# Altium PCB ChassisPowerDistribution_B_1.0_RW.PcbDoc
Units mil, origin at the board's own origin, x right, y up, seen from the top; angles counter-clockwise.
Board outline 3110 x 7580 mil, 2 copper layers (Top Layer, Bottom Layer); 87 components, 40 nets, 301 pads, 65 vias.
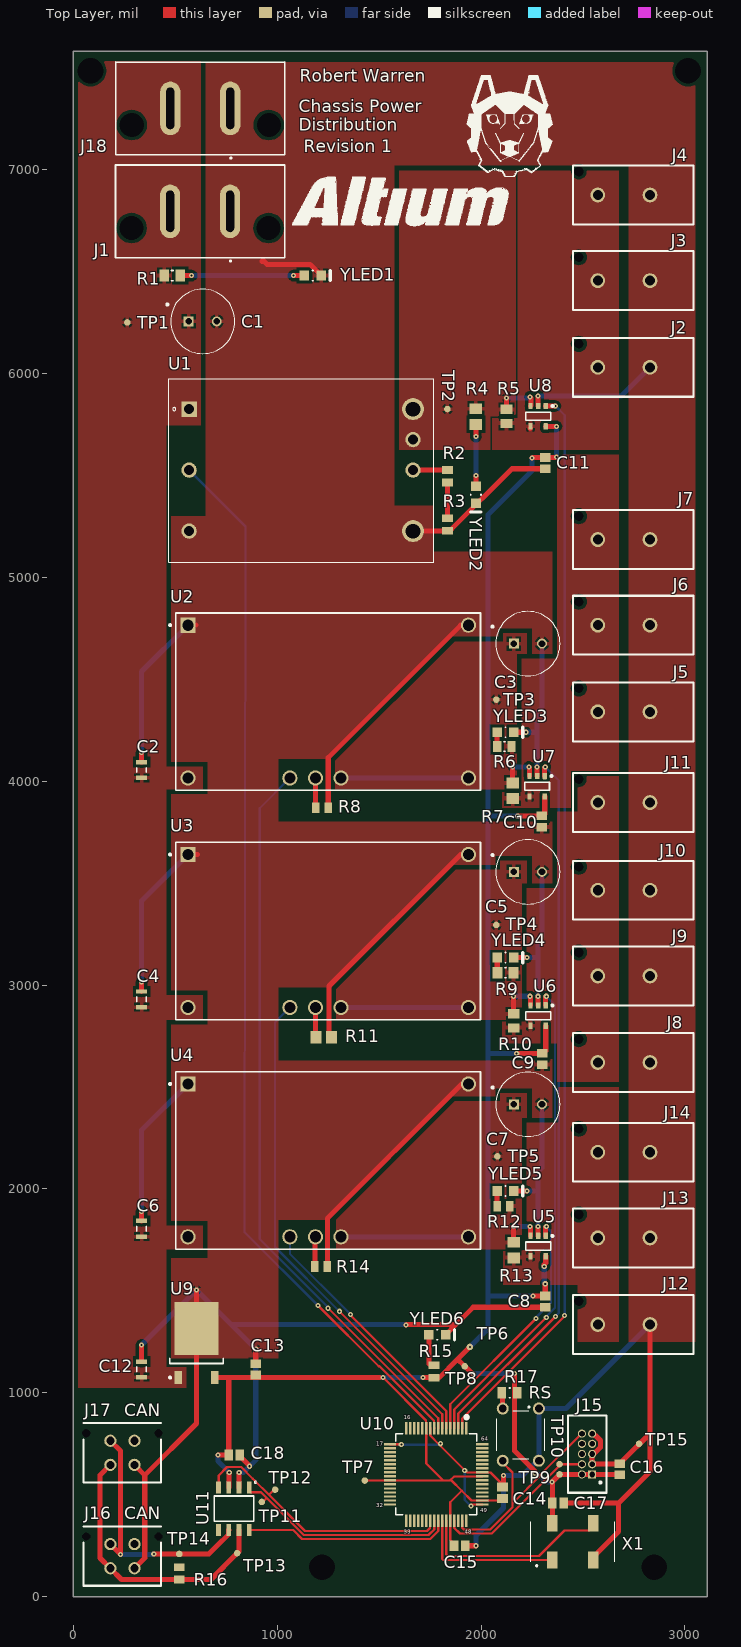
[diagram p0: Top Layer view]
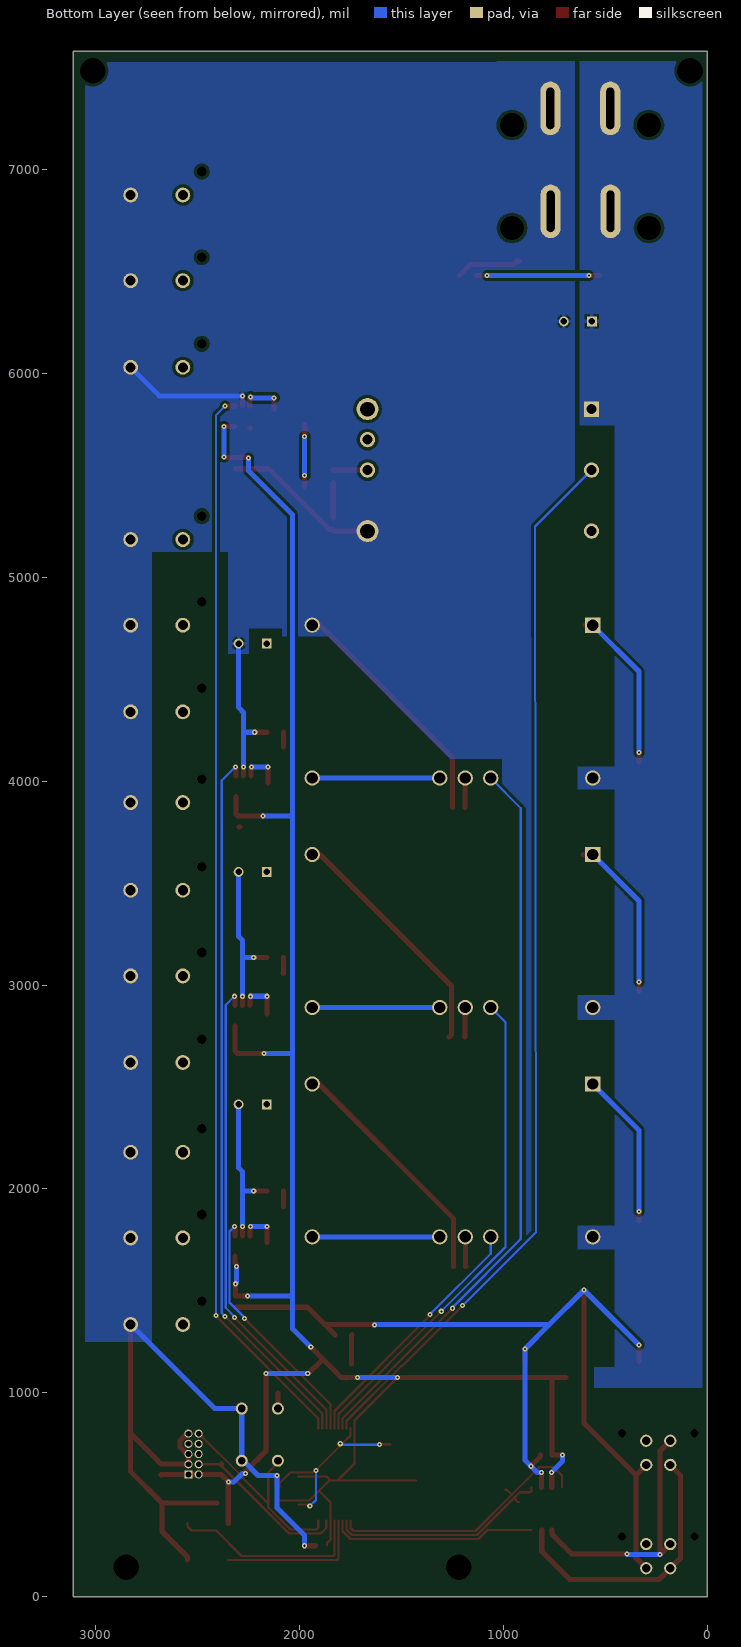
[diagram p1: Bottom Layer view, seen from below]

## Layer stack, top to bottom
Top Solder: solder mask 0.4, Solder Resist, Dk 3.5
Top Layer: signal copper 1.4
Dielectric 1: dielectric 12.6, FR-4, Dk 4.8
Bottom Layer: signal copper 1.4
Bottom Solder: solder mask 0.4, Solder Resist, Dk 3.5

## Board outline
0,0 3110,0 3110,7580 0,7580

## Design rules (kind name [scope] priority, off if disabled: settings)
BoardOutlineClearance [All] p1: gap=10 ignorepadtopadclearanceinfootprint=FALSE
Clearance [All] p1: gap=5 ignorepadtopadclearanceinfootprint=TRUE except(0: Arc-Hole Track-Hole SMDPad-Hole THPad-Hole Via-Hole Fill-Hole Poly-Hole Region-Hole Text-Hole; 8: Track-Track Track-SMDPad Track-THPad Track-Via; 10: Poly-Poly; 15: Arc-Poly Track-Poly SMDPad-Poly THPad-Poly Via-Poly Fill-Poly)
ComponentClearance [All] p1: gap=0 collisioncheckmode=3 verticalgap=100000 showdistances=FALSE
Height [All] p1: minheight=0 maxheight=2000 prefheight=500
HoleSize [All] p1: absolutevalues=TRUE maxlimit=205 minlimit=10 maxpercent=80.000 minpercent=20.000
MinimumAnnularRing [All] p1: minimumring=6
MinimumSolderMaskSliver [All] p1: minsoldermaskwidth=5
PlaneConnect [All] p1: planeconnectstyle=Relief reliefexpansion=20 reliefentries=4 reliefconductorwidth=20 reliefairgap=10
PolygonConnect "15104822204 Connection" [HasFootprint('1510482204')] p1: connectstyle=Direct reliefconductorwidth=10 reliefentries=4 polygonreliefangle="90 Angle" airgapwidth=10
PolygonConnect "1720420202 Connection" [HasFootprint('1720420202')] p2: connectstyle=Direct reliefconductorwidth=10 reliefentries=4 polygonreliefangle="90 Angle" airgapwidth=10
PolygonConnect "*TDK-LAMBDA-I6A4W020A033V-001-R Connection" [HasFootprint('*TDK-LAMBDA_I6A4W020A033V-001-R')] p3: connectstyle=Direct reliefconductorwidth=10 reliefentries=4 polygonreliefangle="90 Angle" airgapwidth=10
PolygonConnect "EUK0007A Connection" [HasFootprint('EUK0007A')] p4: connectstyle=Direct reliefconductorwidth=10 reliefentries=4 polygonreliefangle="90 Angle" airgapwidth=10
PolygonConnect "TD03B_L Connection" [HasFootprint('TD03B_L')] p5: connectstyle=Direct reliefconductorwidth=10 reliefentries=4 polygonreliefangle="90 Angle" airgapwidth=10
PolygonConnect [All] p6: connectstyle=Relief reliefconductorwidth=20 reliefentries=4 polygonreliefangle="90 Angle" airgapwidth=10
RoutingVias [All] p1: holewidth=10 width=25 viastyle="Through Hole" minholewidth=10 minwidth=25 maxholewidth=28 maxwidth=50
SilkToSolderMaskClearance [IsPad] p1: minsilkscreentomaskgap=5 clearancetoexposedcopper=TRUE
SolderMaskExpansion [All] p1: expansion=4 istentingtop=FALSE
Width [All] p1: maxlimit=200 minlimit=5 preferedwidth=25 minimp=50.000000 maximp=50.000000 favimp=50.000000
24 further rules are at their usual default settings.

## Classes and differential pairs
component class "Output Connectors": J2 J3 J4 J5 J6 J7 J8 J9 J10 J11 J12 J13 J14
component class Microcontroller: 0.1µF1 0.1µF6 0.1µF7 0.1µF8 10µF2 C14 C15 C16 C17 C18 J15 J16 J17 R16 R17 RS TP7 TP8 TP9 TP10 TP11 TP12 TP13 TP14 TP15 U10 U11 X1
component class "Current Sensors": 0.1µF2 0.1µF3 0.1µF4 0.1µF5 C8 C9 C10 C11 R5 R7 R10 R13 U5 U6 U7 U8
component class Converters: 2.2µF1 2.2µF2 2.2µF3 2.2µF4 10µF1 100µF 330µF1 330µF2 330µF3 C1 C2 C3 C4 C5 C6 C7 C12 C13 J1 J18 R1 R2 R3 R4 R6 R8 R9 R11 R12 R14 R15 "Super Saber In" TP1 TP2 TP3 TP4 TP5 TP6 U1 U2 U3 U4 U9 YLED1 YLED2 YLED3 YLED4 YLED5 YLED6

## Components (designator, comment, footprint, x,y, rotation, side; value= is the part's Value field where it differs from the comment)
C1 "EEU-FC1V101" *CAPPRD350W60D800H2000 635,6255 r0 top
C2 "C2012X7R1H225K125AC" CAPC2013X145X20LL20 335,4055 r90 top
C3 "EEU-FC1V331B" *CAPPRD350W60D800H2000 2230,4675 r0 top
C4 "C2012X7R1H225K125AC" CAPC2013X145X20LL20 335,2930 r90 top
C5 "EEU-FC1V331B" *CAPPRD350W60D800H2000 2230,3555 r0 top
C6 "C2012X7R1H225K125AC" CAPC2013X145X20LL20 335,1805 r90 top
C7 "EEU-FC1V331B" *CAPPRD350W60D800H2000 2230,2415 r0 top
C8 "C0805C104Z5VACTU" CAPC2013X145X50LL20T25 2315,1447.56 r270 top
C9 "C0805C104Z5VACTU" CAPC2013X145X50LL20T25 2300,2637.56 r270 top value=0.1μF
C10 "C0805C104Z5VACTU" CAPC2013X145X50LL20T25 2297.78,3802.56 r270 top
C11 "C0805C104Z5VACTU" CAPC2013X145X50LL20T25 2315,5560 r270 top
C12 "C2012X7R1H225K125AC" CAPC2013X145X20LL20 335,1115 r90 top
C13 "TPSR106K006R1000" CAPC2113X140X50LL20T30 895,1115 r90 top
C14 "TPSR106K006R1000" CAPC2113X140X50LL20T30 2105,510 r90 top
C15 "C0805C104Z5VACTU" CAPC2013X145X50LL20T25 1895,250 r180 top
C16 "C0805C104Z5VACTU" CAPC2013X145X50LL20T25 2680,625 r270 top
C17 "C0805C104Z5VACTU" CAPC2013X145X50LL20T25 2377.56,460 r0 top
C18 "C0805C104Z5VACTU" CAPC2013X145X50LL20T25 790,695 r0 top
J1 "Super Saber" 1720420202 207,6567 r0 top
J2 "Molex 6.5MM  power connector" 1510482204 3060.63,5849.33 r90 top
J3 "Molex 6.5MM  power connector" 1510482204 3060.63,6274.29 r90 top
J4 "Molex 6.5MM  power connector" 1510482204 3060.63,6694.29 r90 top
J5 "Molex 6.5MM  power connector" 1510482204 3060.63,4159.33 r90 top
J6 "Molex 6.5MM  power connector" 1510482204 3060.63,4584.29 r90 top
J7 "Molex 6.5MM  power connector" 1510482204 3060.63,5004.29 r90 top
J8 "Molex 6.5MM  power connector" 1510482204 3060.63,2439.33 r90 top
J9 "Molex 6.5MM  power connector" 1510482204 3060.63,2864.29 r90 top
J10 "Molex 6.5MM  power connector" 1510482204 3060.63,3284.29 r90 top
J11 "Molex 6.5MM  power connector" 1510482204 3060.63,3714.29 r90 top
J12 "Molex 6.5MM  power connector" 1510482204 3060.63,1154.33 r90 top
J13 "Molex 6.5MM  power connector" 1510482204 3060.63,1579.29 r90 top
J14 "Molex 6.5MM  power connector" 1510482204 3060.63,1999.29 r90 top
J15 "SAMTEC-FTSH-105-01-X-D" SAMTEC-FTSH-105-01-X-D 2635,505 r90 top
J16 "Molex Micro" 0430450427 240.94,199.06 r180 top
J17 "Molex Micro" 0430450427 240.94,705.94 r180 top
J18 "Super Saber" 1720420202 208,7072 r0 top
R1 "RC0805FR-071K4L" RESC2013X60X35ML10T20 485,6480 r180 top value="1.4 kOhm"
R2 "ERJ-6ENF5900V" RESC2013X70X40LL20T20 1835,5495.51 r90 top value="590 Ohm"
R3 "ERJ-6ENF1000V" RESC2013X70X40LL20T20 1835,5259.48 r270 top value="100 Ohm"
R4 "ERJ-6GEYJ112V" RESC2013X70X40ML20T20 1974.45,5788.39 r270 top value="1.1 kOhm"
R5 "RL1220T-R010-J" RESC2013X70X40NL20T20 2125,5789.37 r270 top value="10 mOhms"
R6 "RC0805FR-07487RL" RESC2013X60X35NL10T20 2115,4170 r180 top value="487 Ohm"
R7 "RL1220T-R015-J" RESC2013X70X40ML20T20 2155,3953.39 r270 top value="15 mOhms"
R8 "ERJ-6ENF7320V" RESC2013X70X40LL20T20 1220,3870 r0 top value="732 Ohms"
R9 "RC0805JR-07130RL" RESC2013X60X35ML10T20 2120,3060 r180 top value="130 Ohm"
R10 "RL1220T-R020-J" RESC2013X70X40NL20T20 2160,2824.45 r270 top value="20 mOhms"
R11 "ERJ-6ENF2102V" RESC2013X70X40ML20T20 1228.39,2745 r0 top value="21 kOhms"
R12 "RR1220Q-470-D" RESC2013X50X40LL20T20 2110,1915 r180 top value="47 Ohm"
R13 "RL1220T-R025-J" RESC2013X50X40ML20T20 2160,1700 r270 top value="25 mOhms"
R14 "ERJ-6ENF7872V" RESC2013X70X40LL20T20 1215.51,1620 r0 top value="78.7 kOhms"
R15 "RR1220Q-470-D" RESC2013X50X40LL20T20 1770,1104.49 r90 top value="47 Ohm"
R16 "ERJ-6ENF1200V" RESC2013X70X40LL20T20 520,115 r90 top
R17 "RC0402FR-074K7L" RESC0805(2012)_N 2140,1000 r0 top value="4.7 kOhm"
RS "1825910-7" "Switch 6mm 24V (NO)" 2195,795 r270 top
TP1 "Test Point" "Test Point pad" 280,6230 r90 top
TP2 "Test Point" "Test Point pad" 1855,5840 r180 top
TP3 "Test Point" "Test Point pad" 2095,4415 r180 top
TP4 "Test Point" "Test Point pad" 2095,3310 r180 top
TP5 "Test Point" "Test Point pad" 2065,2180 r270 top
TP6 "Test Point" "Test Point pad" 1965,1240 r180 top
TP7 "Test Point" "Test Point pad" 1445,550 r90 top
TP8 "Test Point" "Test Point pad" 1905,1150 r270 top
TP9 "Test Point" "Test Point pad" 2405,615 r180 top
TP10 "Test Point" "Test Point pad" 2405,665 r180 top
TP11 "Test Point" "Test Point pad" 945,480 r180 top
TP12 "Test Point" "Test Point pad" 1010,540 r180 top
TP13 "Test Point" "Test Point pad" 823.65,228.65 r180 top
TP14 "Test Point" "Test Point pad" 540,225 r180 top
TP15 "Test Point" "Test Point pad" 2760,770 r270 top
U1 "I6A4W020A033V-001-R" *TDK-LAMBDA_I6A4W020A033V-001-R 1117.34,5525.78 r0 top
U2 "PTN78020WAH" EUK0007A 1250,4390 r0 top
U3 "PTN78020WAH" EUK0007A 1250,3265 r0 top
U4 "PTN78020WAH" EUK0007A 1250,2140 r0 top
U5 "INA194AIDBVR" DBV0005A_L 2280,1720 r270 top
U6 "INA194AIDBVR" DBV0005A_L 2280,2850 r270 top
U7 "INA194AIDBVR" DBV0005A_L 2275,3975 r270 top
U8 "INA194AIDBVR" DBV0005A_L 2280,5790 r270 top
U9 "LP2950CDTX-3.3" TD03B_L 604.21,1244.13 r90 top
U10 "CY8C4248AZI-L485" TQFP50P1200X1200X160-64N 1780,600 r270 top
U11 "MCP2562-E/SN" SOIC127P600X175-8N 787.99,431.89 r270 top
X1 "SG-636PCW_50.0000MC3__ROHS" SG-636 2450,270 r0 top
YLED1 "LTST-C170KSKT" LTST-C170KSKT_V 1175,6480 r0 top
YLED2 "LTST-C170KSKT" LTST-C170KSKT_V 1975,5405 r270 top
YLED3 "LTST-C170KSKT" LTST-C170KSKT_V 2120,4240 r0 top
YLED4 "LTST-C170KSKT" LTST-C170KSKT_V 2120,3135 r0 top
YLED5 "LTST-C170KSKT" LTST-C170KSKT_V 2120,1990 r0 top
YLED6 "LTST-C170KSKT" LTST-C170KSKT_V 1785,1285 r0 top

## Footprints (in the part's own frame and the unit in brackets; to place one, negate y for a bottom-side part, rotate by r counter-clockwise, add the part's x,y. Pads: shape width x height; smd on the part's side, far side on the other; paste and mask are expansions set on the pad)
0430450427 [mil] "Molex micro-fit 3.0 4 pos"
  round 60 hole 40: 1(-59.06,59.06) 2(-59.06,-59.05) 3(59.05,59.06) 4(59.05,-59.05)
  round 0 hole 40 unplated: 7(177.16,-96.06) ""(-177.17,-96.06)
  silkscreen extent -190,-145 190,145
1510482204 [mm]
  round 1.85 hole 1.25: 1(4.59,5.898) 2(4.59,12.398)
  round 0 hole 1.2 unplated: 9(7.51,14.748)
  Top Layer region: 5.746,3.673
  silkscreen extent 0.92,0.5 8.26,15.5
1720420202 [mil]
  oval 99x263 hole 203 slot 39 at 0 deg: 1(562,228) 2(268,228)
  round 0 hole 118: ""(79,146) ""(751,146)
  silkscreen extent 0,-20 830,456
*CAPPRD350W60D800H2000 [mm]
  rect 1.23x1.23 hole 0.82: 1(-1.75,0)
  round 1.23 hole 0.82: 2(1.75,0)
  silkscreen extent -4.5,-4 4,4
*TDK-LAMBDA_I6A4W020A033V-001-R [mm]
  rect 1.911x1.911 hole 1.274: 1(-13.95,7.6)
  round 1.911 hole 1.274: 2(-13.95,0) 3(-13.95,-7.6) 6(13.95,0) 7(13.95,3.8)
  round 2.736 hole 1.824: 4(13.95,-7.6) 8(13.95,7.6)
  silkscreen extent -16.5,-11.5 16.5,11.4
CAPC2013X145X20LL20 [mm] "Chip Capacitor, 2-Leads, Body 2.20x1.45mm, IPC High Density"
  rect 0.55x1.35 smd: 1(-0.975,0) 2(0.975,0)
  silkscreen extent -0.3,-0.58 0.3,0.58, body extent -1.1,-0.72 1.1,0.72, height 1.45
CAPC2013X145X50LL20T25 [mm] "Chip Capacitor, 2-Leads, Body 2.00x1.25mm, IPC High Density"
  rect 1.067x1.35 smd: 1(-0.7,0) 2(0.7,0)
  body extent -1.1,-0.72 1.1,0.72, height 1.45
CAPC2113X140X50LL20T30 [mil] "Chip Capacitor, 2-Leads, Body 2.05x1.25mm, IPC High Density"
  rect 43x53.15 smd: 1(-28,0) 2(28,0)
  body extent -44,-29 44,29, height 55
DBV0005A_L [mm] "SOT23, 5-Leads, Body 3.05x1.75mm, Pitch 0.95mm, IPC High Density"
  rrect18% 0.8x0.55 smd: 1(-1.275,0.94) 4(1.275,-0.95) 5(1.275,0.95)
  rrect18% 0.787x0.55 smd: 2(-1.275,0) 3(-1.275,-0.95)
  silkscreen extent -1.4,-1.55 0.5,1.9, body extent -1.42,-1.46 1.42,1.46, height 1.08
EUK0007A [mm] "Module, 7-Leads, Body 37.97x22.1mm"
  rect 1.9x1.9 hole 1.4: 1(-17.465,9.53)
  round 1.9 hole 1.4: 2(-17.465,-9.52) 3(-4.765,-9.52) 4(-1.585,-9.52) 5(1.595,-9.52) 6(17.475,-9.52) 7(17.475,9.53)
  silkscreen extent -19.81,-11.05 18.98,11.05, body extent -18.98,-11.05 18.98,11.05, height 9
LTST-C170KSKT_V [mm] "SMD, 2-Leads, Body 2x1.25mm"
  rect 1.2x1.2 smd: 1(-1.05,0) 2(1.05,0)
  silkscreen extent -0.05,-0.64 2.16,0.63, body extent -1,-0.63 1,0.63, height 1.2
RESC0805(2012)_N [mm] "Chip Resistor, Body 2.0x1.3mm, IPC Medium Density"
  rect 1.05x1.4 smd: 1(-0.95,0) 2(0.95,0)
  silkscreen extent -0.05,-0.6 0.05,0.6, body extent -1.1,-0.67 1.1,0.68, height 0.7
RESC2013X50X40LL20T20 [mm] "Chip Resistor, 2-Leads, Body 2.00x1.25mm, IPC High Density"
  rect 0.95x1.35 smd: 1(-0.775,0) 2(0.775,0)
  body extent -1.1,-0.72 1.1,0.72, height 0.5
RESC2013X50X40ML20T20 [mm] "Chip Resistor, 2-Leads, Body 2.00x1.25mm, IPC Low Density"
  rect 1.35x1.55 smd: 1(-0.975,0) 2(0.975,0)
  body extent -1.1,-0.72 1.1,0.72, height 0.5
RESC2013X60X35ML10T20 [mm] "Chip Resistor, 2-Leads, Body 2.00x1.25mm, IPC Low Density"
  rect 1.2x1.45 smd: 1(-1,0) 2(1,0)
  silkscreen extent -0.1,-0.63 0.1,0.63, body extent -1.05,-0.67 1.05,0.67, height 0.6
RESC2013X60X35NL10T20 [mm] "Chip Resistor, 2-Leads, Body 2.00x1.25mm, IPC Medium Density"
  rect 1x1.35 smd: 1(-0.9,0) 2(0.9,0)
  silkscreen extent -0.1,-0.58 0.1,0.58, body extent -1.05,-0.67 1.05,0.67, height 0.6
RESC2013X70X40LL20T20 [mm] "Chip Resistor, 2-Leads, Body 2.00x1.25mm, IPC High Density"
  rect 0.95x1.35 smd: 1(-0.775,0) 2(0.775,0)
  body extent -1.1,-0.72 1.1,0.72, height 0.7
RESC2013X70X40ML20T20 [mm] "Chip Resistor, 2-Leads, Body 2.00x1.25mm, IPC Low Density"
  rect 1.35x1.55 smd: 1(-0.975,0) 2(0.975,0)
  body extent -1.1,-0.72 1.1,0.72, height 0.7
RESC2013X70X40NL20T20 [mm] "Chip Resistor, 2-Leads, Body 2.00x1.25mm, IPC Medium Density"
  rect 1.15x1.45 smd: 1(-0.875,0) 2(0.875,0)
  body extent -1.1,-0.72 1.1,0.72, height 0.7
SAMTEC-FTSH-105-01-X-D [mil]
  rect 40x40 hole 28 mask+3: 1(95,90)
  round 40 hole 28 mask+3: 2(95,140) 3(145,90) 4(145,140) 5(195,90) 6(195,140) 7(245,90) 8(245,140) 9(295,90) 10(295,140)
  silkscreen extent 5,20 385,209
SG-636 [mm]
  rect 1.3x2.1 smd: 1(-2.54,-2.3) 2(2.54,-2.3) 3(2.54,2.3) 4(-2.54,2.3)
  silkscreen extent -5.25,-3.1 5.25,2.5
SOIC127P600X175-8N [mm]
  rect 1.5x0.6 smd: 1(-2.65,1.905) 2(-2.65,0.635) 3(-2.65,-0.635) 4(-2.65,-1.905) 5(2.65,-1.905) 6(2.65,-0.635) 7(2.65,0.635) 8(2.65,1.905)
  silkscreen extent -3.44,-2.45 1.58,2.81
"Switch 6mm 24V (NO)" [mm]
  round 1.498 hole 0.99: 1(-3.25,2.25) 2(3.25,2.25) 3(-3.25,-2.25) 4(3.25,-2.25)
  silkscreen extent -3.53,-3 3,3
TD03B_L [mm] "D-PAK, 4-Leads, Body 6.1x6.6mm, Pitch 2.29mm, Lead Span 9.7mm, IPC High Density"
  rect 1.6x0.9 smd: 1(-4.3,2.28) 3(-4.3,-2.28)
  rect 6.6x5.45 smd: 4(1.8,0)
  silkscreen extent -4.42,-3.35 -1.9,3.4, body extent -2.55,-3.35 3.65,3.35, height 2.38
"Test Point pad" [mil]
  round 32 smd: 1(20,15)
TQFP50P1200X1200X160-64N [mm]
  rect 1.55x0.3 smd mask+0: 1(-5.75,3.75) 2(-5.75,3.25) 3(-5.75,2.75) 4(-5.75,2.25) 5(-5.75,1.75) 6(-5.75,1.25) 7(-5.75,0.75) 8(-5.75,0.25) 9(-5.75,-0.25) 10(-5.75,-0.75) 11(-5.75,-1.25) 12(-5.75,-1.75) 13(-5.75,-2.25) 14(-5.75,-2.75) 15(-5.75,-3.25) 16(-5.75,-3.75) 33(5.75,-3.75) 34(5.75,-3.25) 35(5.75,-2.75) 36(5.75,-2.25) 37(5.75,-1.75) 38(5.75,-1.25) 39(5.75,-0.75) 40(5.75,-0.25) 41(5.75,0.25) 42(5.75,0.75) 43(5.75,1.25) 44(5.75,1.75) 45(5.75,2.25) 46(5.75,2.75) 47(5.75,3.25) 48(5.75,3.75)
  rect 0.3x1.55 smd mask+0: 17(-3.75,-5.75) 18(-3.25,-5.75) 19(-2.75,-5.75) 20(-2.25,-5.75) 21(-1.75,-5.75) 22(-1.25,-5.75) 23(-0.75,-5.75) 24(-0.25,-5.75) 25(0.25,-5.75) 26(0.75,-5.75) 27(1.25,-5.75) 28(1.75,-5.75) 29(2.25,-5.75) 30(2.75,-5.75) 31(3.25,-5.75) 32(3.75,-5.75) 49(3.75,5.75) 50(3.25,5.75) 51(2.75,5.75) 52(2.25,5.75) 53(1.75,5.75) 54(1.25,5.75) 55(0.75,5.75) 56(0.25,5.75) 57(-0.25,5.75) 58(-0.75,5.75) 59(-1.25,5.75) 60(-1.75,5.75) 61(-2.25,5.75) 62(-2.75,5.75) 63(-3.25,5.75) 64(-3.75,5.75)
  silkscreen extent -7.33,-5.05 5.05,5.05, body extent -5.12,-5.12 5.12,5.12, height 1.6

## Part data
C1: library part PNSC-CAP-P-2, "Aluminum Electrolytic Capacitor, 100 uF +/- 20%, 35 V, -55 to 105 degC, 2-Pin 8 x 8 x 11.5 mm Through-hole, RoHS, Tape and Reel", Capacitance Tolerance="+/- 20%", Manufacturer=Panasonic, Rated Voltage="35 V", Ripple Current="555 mA", Temp. Range="-55 to 105 degC", Cap.="100 uF", ComponentLink1Description="Manufacturer URL", ComponentLink1URL=http://industrial.panasonic.com/, ComponentLink2Description=Datasheet, ComponentLink2URL=http://industrial.panasonic.com/www-cgi/jvcr13pz.cgi?E+PZ+3+ABA0022+EEUFC1V101+7+WW, ComponentLink3Description="Package Specification", ComponentLink3URL=http://industrial.panasonic.com/www-data/pdf/ABA0000/ABA0000PE245.pdf, Mounting Technology="Through Hole", PackageDescription="2-Pin Through-hole, Base 8 x 8 mm, Height 11.5 mm", PackageReference=EEU-FC1V101, Packing="Tape and Reel", PartNumber=EEU-FC1V101, RoHS=TRUE
C2 C4 C6 C12: library part CMP-2000-06040-1, "Chip Capacitor, 2.2 uF, +/- 10%, 50 V, -55 to 125 degC, 0805 (2012 Metric), RoHS, Tape and Reel", Capacitance=2.2µF, Manufacturer=TDK, Operating Temperature=-55°C~125°C, Package / Case=0805(2012Metric), Package Description="2-Pin Surface Mount Device, Body 2 x 1.25 mm", Package Reference=0805, PCN Part Number=MLCCPartNumberChange30/Nov/2012, Ratings=-, Standard Package=1, Temperature Coefficient=X7R, Tolerance=±10%, Voltage - Rated=50V, Applications=GeneralPurpose, Catalog Drawings=CSERIES_2012-0805_1.45, Category=Capacitors, Datasheet URL=https://datasheet.ciiva.com/24216/c2012x7r1h225k125ac-265016-24216364.pdf, Datasheet Version=09/2013, Family=CeramicCapacitors, Features=-, Height - Seated (Max)=-, Kits=445-9015-KIT-ND-KITMLCC1000PF-47UF080510-50V445-9003-KIT-ND-KITCAPCERHICAPMLCCSMD445-173086-KIT-ND-C0402-2220X7R6.3-50V1,000PF-, Lead Spacing=-, Lead Style=-, Manufacturer URL=http://www.tdk.com/, Mounting Technology=SurfaceMount, Mounting Type=SurfaceMount,MLCC, Online Catalog=CSeries,GeneralPurpose, Other Names=445-5968-1, Packaging=CutTape(CT), Product Training Modules=CSeriesGeneralApplicationsSEAT,CCV,andTVCLDesignToolsGuidetoReplacinganElectrolyticCapacitorwithanMLCC, RoHS Information=RoHSCertificate-MLCC, Series=C, Size / Dimension="0.079\"Lx0.049\"W(2.00mmx1.25mm)", Thickness (Max)="0.057\"(1.45mm)"
C3 C5 C7: library part PNSC-CAP-P-2, "Aluminum Electrolytic Capacitor, 330 uF +/- 20%, 35 V, -55 to 105 degC, 2-Pin 10 x 10 x 17 mm Through-hole, RoHS, Cut Tape", Capacitance Tolerance="+/- 20%", Manufacturer=Panasonic, Rated Voltage="35 V", Ripple Current="1.05 A", Temp. Range="-55 to 105 degC", Cap.="330 uF", ComponentLink1Description="Manufacturer URL", ComponentLink1URL=http://industrial.panasonic.com/, ComponentLink2Description=Datasheet, ComponentLink2URL=http://industrial.panasonic.com/www-cgi/jvcr13pz.cgi?E+PZ+3+ABA0022+EEUFC1V101+7+WW, ComponentLink3Description="Package Specification", ComponentLink3URL=http://industrial.panasonic.com/www-data/pdf/ABA0000/ABA0000PE245.pdf, Mounting Technology="Through Hole", PackageDescription="2-Pin Through-hole, Base 10 x 10 mm, Height 17 mm", PackageReference=EEU-FC1V331B, Packing="Cut Tape", PartNumber=EEU-FC1V331B, RoHS=TRUE
C8 C9 C10 C11 C15 C16 C17 C18: library part CAP, Manufacturer=Kemet, Part Number=C0805C104Z5VACTU
  C8 C10 C11 C15 C16 C17 C18: Cap.=0.1μF
C13 C14: library part CAP, Manufacturer="AVX Interconnect / Elco", Cap.=10μF, Part Number=TPSR106K006R1000
J16 J17: library part "Molex micro-fit 4-pin (Single row schematic)", "Molex micro-fit 3.0 dual row header. P/N 0430450427"
R1: library part CMP-2001-00962-1, Manufacturer=Yageo, Part Number=RC0805FR-071K4L
R2: library part CMP-2001-00245-1, Manufacturer=Panasonic, Part Number=ERJ-6ENF5900V
R3: library part CMP-1665-00009-4, "Chip Resistor, 100 Ohm, +/- 1%, 0.125 W, -55 to 155 degC, 0805 (2012 Metric), RoHS, Tape and Reel", Manufacturer=Panasonic, Max Operating Temperature="155 degC", Min Operating Temperature="-55 degC", Package Quantity=5000, Voltage Rating="150 V", ComponentLink1Description="Manufacturer URL", ComponentLink1URL=http://www.panasonic.com/, ComponentLink2Description=Datasheet, ComponentLink2URL=http://industrial.panasonic.com/cdbs/www-data/pdf/RDA0000/AOA0000C86.pdf, DatasheetVersion=04/2015, Height="0.6 mm", Length="2 mm", Mount="Surface Mount", Mounting Technology="Surface Mount", PackageDescription="2-Pin Surface Mount Device, Body 2 x 1.25 mm", PackageReference=0805, Packaging="Tape and Reel", Pins=2, REACH SVHC=Yes, RoHSCompliant=true
R4: library part CMP-2001-00342-1, Manufacturer=Panasonic, Part Number=ERJ-6GEYJ112V
R5: library part CMP-2001-04465-1, Manufacturer=Susumu, Part Number=RL1220T-R010-J
R6: library part CMP-2001-01162-1, Manufacturer=Yageo, Part Number=RC0805FR-07487RL
R7: library part CMP-2001-04466-1, Manufacturer=Susumu, Part Number=RL1220T-R015-J
R8: library part CMP-2001-00285-1, Manufacturer=Panasonic, Part Number=ERJ-6ENF7320V
R9: library part CMP-2001-01345-1, Manufacturer=Yageo, Part Number=RC0805JR-07130RL
R10: library part CMP-2001-04468-1, Manufacturer=Susumu, Part Number=RL1220T-R020-J
R11: library part CMP-2001-00037-1, Manufacturer=Panasonic, Part Number=ERJ-6ENF2102V
R12 R15: library part CMP-2001-03559-1, Manufacturer=Susumu, Part Number=RR1220Q-470-D
R13: library part CMP-2001-03177-1, Manufacturer=Susumu, Part Number=RL1220T-R025-J
R14: library part CMP-2001-00298-1, Manufacturer=Panasonic, Part Number=ERJ-6ENF7872V
R16: library part CMP-1665-00010-4, "Chip Resistor, 120 Ohm, +/- 1%, 0.125 W, -55 to 155 degC, 0805 (2012 Metric), RoHS, Tape and Reel", Manufacturer=Panasonic, Max Operating Temperature="155 degC", Min Operating Temperature="-55 degC", Package Quantity=5000, Voltage Rating="150 V", ComponentLink1Description="Manufacturer URL", ComponentLink1URL=http://www.panasonic.com/, ComponentLink2Description=Datasheet, ComponentLink2URL=http://industrial.panasonic.com/cdbs/www-data/pdf/RDA0000/AOA0000C86.pdf, DatasheetVersion=04/2015, Height="0.6 mm", Length="2 mm", Mount="Surface Mount", Mounting Technology="Surface Mount", PackageDescription="2-Pin Surface Mount Device, Body 2 x 1.25 mm", PackageReference=0805, Packaging="Tape and Reel", Pins=2, REACH SVHC=Yes, RoHSCompliant=true
R17: library part RES, Manufacturer="Yageo / Phycomp", Part Number=RC0402FR-074K7L
RS: library part "Switch 6mm 24V (NO)", "FSM4JAH=6MM TACT SWITCH, HIGH TEMP", Contact_Current_Rating="50 mA", Package=None, Configuration_Pole-Throw="Single Pole - Single Throw", Digi-Key_Part_Number=450-1804-ND, Digi-Key_Purchase_URL=https://www.digikey.com/product-detail/en/te-connectivity-alcoswitch-switches/1825910-7/450-1804-ND/1731414?utm_source=snapeda&utm_medium=aggregator&utm_campaign=symbol, EU_RoHS_Compliance=Compliant, MF="TE Connectivity", MP=1825910-7, SnapEDA_Link=https://www.snapeda.com/parts/1825910-7/TE%20Connectivity%20ALCOSWITCH%20Switches/view-part/?ref=snap, TE_purchase_URL=https://www.te.com/usa-en/product-1825910-7.html?te_bu=Cor&te_type=disp&te_campaign=seda_glo_cor-seda-global-disp-prtnr-fy19-seda-model-bom-cta_sma-317_1&elqCampaignId=32493
U1: "Dc-Dc, Pcb Mount, Sixteenth Brick, Input 24vdc, Output 3.3-15v 20a, 250w, Neg Logic", Package="DIP-7 TDK-Lambda", Digi-Key_Part_Number=285-2503-ND, Digi-Key_Purchase_URL=https://www.digikey.com/product-detail/en/tdk-lambda-americas-inc/I6A4W020A033V-001-R/285-2503-ND/5878834?utm_source=snapeda&utm_medium=aggregator&utm_campaign=symbol, MF="TDK-Lambda Americas", MP=I6A4W020A033V-001-R, SnapEDA_Link=https://www.snapeda.com/parts/I6A4W020A033V-001-R/TDK-Lambda%20Americas%20Inc./view-part/?ref=snap
U2 U3 U4: library part CMP-0387-00547-2, "6 A Wide-Input Voltage Adjustable Switching Regulator, -40 to 85 degC, 7-pin Module (EUK7), Pb-Free (RoHS)", Manufacturer="Texas Instruments", ComponentLink1Description="Manufacturer URL", ComponentLink1URL=http://www.ti.com/, ComponentLink2Description=Datasheet, ComponentLink2URL=http://www.ti.com/general/docs/lit/getliterature.tsp?genericPartNumber=PTN78020W&fileType=pdf, ComponentLink3Description="Package Specification", ComponentLink3URL=http://www.ti.com/litv/pdf/mpds185, ComponentLink4Description="URL Link1", ComponentLink4URL="Samples URL:http://www.ti.com/product/ptn78020w#samples", DatasheetVersion=SLTS228C, Eco-Plan="Pb-Free (RoHS)", Iout(Max)(A)=6, Mounting Technology="Through Hole", PackageDescription="7-Pin Plastic Special Shape, Body 22.1 x 37.97 mm", PackageReference=EUK0007A, PackageVersion=4204986-2/C, PartNumber=PTN78020WAH, Regulated Outputs(#)=1, SubFamily="Non-Isolated POL", Vin(Max)(V)=36, Vin(Min)(V)=7, VO Adjustable=TRUE, Vout(Max)(V)=12.6, Vout(Min)(V)=2.5
U5 U6 U7 U8: library part TI-INA1XXDBV5, "Voltage Output High-Side Measurement Current Shunt Monitor, 2.7 to 18 V, -40 to 125 degC, 5-pin SOT23 (DBV5), Green (RoHS & no Sb/Br)", Manufacturer="Texas Instruments", Quiescent Current (+/-)(Typ)(mA)=0.7, Rating=Catalog, CMRR(Min)(dB)=80, Code_JEDEC=MO-178, Common Mode Range(Max)(V)=80, Common Mode Range(Min)(V)=-16, ComponentLink1Description="Manufacturer URL", ComponentLink1URL=http://www.ti.com/, ComponentLink2Description=Datasheet, ComponentLink2URL=http://www.ti.com/general/docs/lit/getliterature.tsp?genericPartNumber=INA194&fileType=pdf, ComponentLink3Description="Package Specification", ComponentLink3URL=http://www.ti.com/lit/ml/mpds018j/mpds018j.pdf, DatasheetVersion=SBOS307F, Eco-Plan="Green (RoHS & no Sb/Br)", Gain(V/V)=50, Input Offset (+/-)(Max)(uV)=2000, Mounting Technology="Surface Mount", Output Type=Voltage, PackageDescription="5-Pin Plastic Small Outline, Body 1.6 x 2.9 mm, Pitch 0.95 mm", PackageReference=DBV0005A, PackageVersion="4073253-4/K, 03/2006", PartNumber=INA194AIDBVR, Small-Signal Bandwidth(Typ)(MHz)=0.3, SubFamily="Current Shunt Monitor", Vs(Max)(V)=18, Vs(Min)(V)=2.7
U9: library part CMP-0062-00251-2, "Series of Adjustable Micropower Voltage Regulators, 3-pin TO-252", Manufacturer="National Semiconductor", PackageTopMarking=NSUZXYTT*LP2950*CDT-3.3, PowerWise=N, Code_JEDEC=TO-252-AA, ComponentLink1Description="LP2950 Datasheet", ComponentLink1URL=http://www.national.com/ds/LP/LP2950.pdf, ComponentLink2Description="LP2950 Web Page", ComponentLink2URL=http://www.national.com/pf/LP/LP2950.html, ComponentLink3Description="TD03B Package Page", ComponentLink3URL=http://www.national.com/packaging/folders/td03b.html, CompType="LDO IC", DatasheetVersion=May-2005, PackageDescription="TO252, Molded, Jedec, 6.8 x 6.10 x 2.30mm Body, 3 Lead, 2.28mm Pitch, Surface Mount", PackageReference=TD03B, PackageVersion="revD, Feb-2009", PinCount=3, RevisionNote="Component URLs added", RoHS=N
U11: "Microchip MCP2562-E/SN, CAN Transceiver 1MBps 1-channel IEC 61000-4-2, 8-Pin SOIC", Package="SO-8 Microchip", Availability=Unavailable, MF=Microchip, MP=MCP2562-E/SN, Price=None, SnapEDA_Link=https://www.snapeda.com/parts/MCP2562-E/SN/Microchip/view-part/?ref=snap
X1: library part SG-636, "Standard Clock Oscillators 50MHz 3.3Volt 100ppm -20C +70C", Arrow Part Number="SG-636PCW 50.0000MC3: ROHS", Manufacturer_Name="Epson Timing", Datasheet Link=http://www.mouser.com/ds/2/137/G-636PCE_en-1003252.pdf, Manufacturer_Part_Number="SG-636PCW 50.0000MC3: ROHS"
YLED1 YLED2 YLED3 YLED4 YLED5 YLED6: library part CMP-2000-06621-1, "LED Yellow, 75 mW, 80 mA, -55 to 85 degC, 2-Pin SMD, RoHS, Tape and Reel", Emitting Color=Amber, Forward Current=30mA, Forward Voltage=2.4V, Manufacturer=Lite-On, Operating Temperature Classification=Industrial, Operating Temp Range=-55Cto85C, Package Description="2-Pin Surface Mount Device, Body 2 x 1.25 mm", Package Reference=C170KSKT, Package Type=ChipLed, Power Dissipation=75W, Reverse Voltage=5V, Test Current (It)=20mA, Chip Material=AlGaInP, Datasheet URL=http://optoelectronics.liteon.com/upload/download/DS-22-99-0188/S_110_LTST-C170KSKT.pdf, Datasheet Version="Rev. H, 04/2014", DELETED=Compliant, Dominant Wave Length=587nm, High Brightness=Yes, Lens Dimensions=1.4x1.25x0.6mm, Luminous Intensity=112mcd, Lum Intensity=112mcd, Main Category=ChipLED, Manufacturer URL=http://www.us.liteon.com/, Mounting=SurfaceMount, Mounting Technology=SurfaceMount, Number of  Elements=1, Packaging=TapeandReel, Peak Wavelength=588nm, Pin Count=2, Product Depth (mm)=1.25mm, Product Height (mm)=1.1mm, Product Length (mm)=2mm, Rad Hardened=No, Shape Type=Rectangular, Type=Uni-Color, Viewing Angle=130deg
U10: Part_Number=CY8C4248AZI-L485

## Free pads (board coordinates)
  round 60 hole 125.98 unplated: 1(85,7485) 1(1220,145) 1(2850,145) 1(3015,7485)

## Via types
v1: diameter 25, hole 10, Top Layer to Bottom Layer, 65 vias

## Nets (pads, with @x,y where several pads share a name; then routed paths per layer and width w, separated by ;. In a path a pad name is that pad's centre, name@x,y a point inside that pad or via, vN(x,y) a via of type N, cw(c..) or ccw(c..) an arc to the next point about the centre after c; other vN are vias at no path point)
3V3: C8.1 C9.1 C10.1 C11.1 C13.1 C14.1 C15.2 C16.2 C17.1 C18.1 J15.1 J15.2 R15.1 R17.2 TP6.1 TP7.1 TP8.1 TP9.1 U5.5 U6.5 U7.5 U8.5 U9.3 U10.11 U10.26 U10.44 U10.50 U10.56 U11.3 X1.4 | length 11279.5
  Top Layer w11: TP7.1 1430.47,570.47 U10.26 1814.53,570.47 ; v1(1520,1075) 1730.51,864.49 1730.51,855.28 1730.79,855 U10.11 ; U10.11@1731.07,826.37 1731.07,653.93 1814.53,570.47 ; 1850,570 1855,570 1905,520 ; C15.2@1865,252.44 1865,263.9 1848.9,280 1848.9,463.9 1905,520 ; U10.56 1868.11,590.15 1851.48,573.52 1848.43,570.47 1814.53,570.47 ; C14.1@2107.04,472.04 U10.50 2006.1,472.32 1952.68,472.32 1905,520
  Top Layer w25: U9.3 694.11,1074.7 765,1074.7 ; v1(710,695) C18.1 762.44,1072.14 765,1074.7 ; U11.3 762.99,607.99 v1(765,610) ; 1505,1074.56 895,1074.56 894.86,1074.7 765,1074.7 ; v1(1715,1075) R15.1@1744.49,1075 ; R15.1@1745,1074.49 R15.1@1744.49,1075 ; R15.1 R15.1@1768.98,1075 ; v1(1945,1225) 1885,1165 ; v1(1960,1095) 1956.89,1095 1921.89,1130 TP8.1 1885,1165 ; v1(2165,1095) 2165,714.94 2265,614.94 v1(2265,605) ; v1(2175,2665) C9.1@2300.6,2665 ; v1(2180,3830) 2297.66,3830 C10.1 ; v1(2250,5585) 2252.56,5587.56 C11.1 2367.56,5587.56 v1(2370,5590) ; v1(2255,1475) 2314.88,1475 C8.1 ; C10.1@2296.48,3831.42 C10.1 ; C9.1@2301.2,2666.32 C9.1 2305.57,2665.12 2317.4,2676.94 U6.5 ; v1(2310,1620) 2310,1630 2317.4,1637.4 U5.5 ; U7.5 2312.4,3839.17 2303.23,3830 2297.78,3830 C10.1 ; C8.1@2315,1475 C8.1 ; v1(2315,1535) C8.1 ; U8.5 2317.6,5740 v1(2370,5740) ; X1.4 C17.1 2350,560 v1(2347.81,562.19) 2347.5,562.5 TP9.1 J15.2 J15.1 2546.28,598.72 2678.72,598.72 C16.2 ; R15.1@1744.49,1075 R15.1@1768.98,1075 ; R15.1@1768.98,1075 1793.98,1075 1794.49,1074.49 1885,1165
  Bottom Layer w25: v1(710,695) 710,665 v1(765,610) ; v1(1520,1075) v1(1715,1075) ; v1(1945,1225) 2034.54,1314.54 2034.54,1475 ; v1(1960,1095) v1(2165,1095) ; 2039.54,2665 v1(2175,2665) ; 2039.54,3830 v1(2180,3830) ; v1(2250,5585) 2250,5522.56 2034.54,5307.1 2034.54,3830 2034.54,2665 2034.54,1475 ; v1(2255,1475) 2034.54,1475 ; v1(2265,605) 2280,605 2322.81,562.19 v1(2347.81,562.19) ; v1(2310,1620) 2310,1540 v1(2315,1535) ; v1(2370,5590) v1(2370,5740)
3V3_Converter_Enable: U4.3 U10.6 | length 1256.4
  Top Layer w11: v1(1360,1385) 1360,1380 1829.21,910.79 U10.6
  Bottom Layer w11: U4.3 1062.4,1682.6 v1(1360,1385)
3V3_Converter_Out: C7.1 R12.1 R13.1 TP5.1 U4.5 U4.6 U5.3 | length 827.7
  Top Layer w25: R13.1 v1(2160,1815) ; v1(2240,1815) 2242.6,1812.4 U5.3
  Bottom Layer w25: U4.5 U4.6 ; v1(2160,1815) v1(2240,1815)
3V3_Current_Sensor: U5.1 U10.5 | length 1249.2
  Top Layer w11: U10.5 1848.9,943.9 v1(2270,1365)
  Top Layer w25: U5.1 2317,1812 v1(2320,1815)
  Bottom Layer w11: v1(2270,1365) 2270,1370 2343.4,1443.4 2343.4,1791.6 v1(2320,1815)
3V3_Out: J12.2 J13.2 J14.2 R13.2 U5.4
5V_Converter_Enable: U3.3 U10.7 | length 2433.3
  Top Layer w11: v1(1305,1400) 1809.53,895.47 U10.7
  Bottom Layer w11: U3.3 990,2817.79 990,1715 v1(1305,1400)
5V_Converter_Out: C5.1 R9.1 R10.1 TP4.1 U3.5 U3.6 U6.3 | length 837.2
  Top Layer w25: R10.1 v1(2160,2945) ; v1(2240,2945) 2242.6,2942.4 U6.3
  Bottom Layer w25: U3.5 U3.6 ; v1(2160,2945) v1(2240,2945)
5V_Current_Sensor: U6.1 U10.4 | length 2386.8
  Top Layer w11: U10.4 1868.58,918.58 v1(2320,1370)
  Top Layer w25: U6.1 2317,2942 v1(2320,2945)
  Bottom Layer w11: v1(2320,1370) 2320,1375 2362.4,1417.4 2362.4,2902.6 v1(2320,2945)
5V_Out: J8.2 J9.2 J10.2 J11.2 R10.2 U6.4
12V_Converter_Enable: U2.3 U10.8 | length 3612.2
  Top Layer w11: v1(1250,1415) 1789.56,875.44 1789.56,826.65 U10.8
  Bottom Layer w11: U2.3 915,3867.79 915,1800 915,1754.12 1250,1419.12 v1(1250,1415)
12V_Converter_Out: C3.1 R6.1 R7.1 TP3.1 U2.5 U2.6 U7.3 | length 829.3
  Top Layer w25: R7.1 v1(2155,4070) ; v1(2235,4070) 2237.6,4067.4 U7.3
  Bottom Layer w25: U2.5 U2.6 ; v1(2155,4070) v1(2235,4070)
12V_Current_Sensor: U7.1 U10.3 | length 3521.4
  Top Layer w11: U10.3 1888.27,898.27 v1(2365,1375)
  Top Layer w25: U7.1 2312,4067 v1(2315,4070)
  Bottom Layer w11: v1(2315,4070) 2381.4,4003.6 2381.4,1391.4 v1(2365,1375)
12V_Out: J5.2 J6.2 J7.2 R7.2 U7.4
24V_Converter_Enable: U1.2 U10.9 | length 5201.8
  Top Layer w11: v1(1200,1428.23) 1497.82,1130.41 1501.94,1130.41 1769.88,862.48 1769.88,826.65 U10.9
  Bottom Layer w11: U1.2 844.99,5248.93 839.97,1815 839.97,1788.26 v1(1200,1428.23)
24V_Converter_Out: R4.1 R5.1 TP2.1 U1.7 U1.8 U8.3 | length 220.9
  Top Layer w25: R5.1 v1(2125,5880) ; v1(2240,5885) 2244.78,5880.22 2244.78,5852.25 2244.27,5851.74 2244.27,5841.87 U8.3
  Bottom Layer w25: v1(2125,5880) 2235,5880 v1(2240,5885)
24V_Current_Sensor: U8.1 U10.2 | length 5288.3
  Top Layer w11: U10.2 1907.95,874.72 2410,1376.77 v1(2410,1380)
  Top Layer w25: U8.1 2317.2,5840 v1(2365,5840)
  Bottom Layer w11: v1(2365,5840) 2410,5795 v1(2410,1380)
24V_Out: J2.2 J3.2 J4.2 R5.2 U8.4 | length 3.4
  Top Layer w25: U8.4@2240,5730 2240.67,5730 U8.4@2242.6,5731.93
CAN_RXD: TP12.1 U10.39 U11.4 | length 1325.5
  Top Layer w11: U11.4 712.99,594.76 754.23,636 823.64,636 880.39,579.25 888.3,571.34 959.82,499.82 ; TP12.1 985,525 959.82,499.82 ; U10.39@1750.19,373.62 1750.19,337.51 1735.29,322.61 1137.03,322.61 959.82,499.82
CAN_STBY: U10.41 U11.8 | length 1012.1
  Top Layer w11: U11.8 1078.34,327.56 1122.4,283.5 1750.37,283.5 1789.84,322.97 U10.41
CAN_TXD: TP11.1 U10.40 U11.1 | length 1101
  Top Layer w11: U11.1 862.99,518.5 869.3,512.19 920.58,512.19 948.88,483.88 ; TP11.1 930,465 948.88,483.88 ; U10.40 1770.16,330.16 1742.5,302.5 1130.27,302.5 948.88,483.88
CANH: J16.3 J17.3 R16.1 TP13.1 U11.7 | length 1364.3
  Top Layer w25: J17.3 131.39,596.39 131.39,190.5 J16.3 236.89,85 505,85 675,85 TP13.1 812.3,222.3 812.3,326.87 U11.7
CANL: J16.4 J17.4 TP14.1 U11.6 | length 1241.9
  Top Layer w25: J16.4 v1(232.39,207.61) 232.39,714.5 J17.4 ; v1(395,210) 665,210 707.12,252.12 707.88,252.12 762.3,306.54 762.3,326.87 U11.6
  Bottom Layer w25: v1(232.39,207.61) 392.61,207.61 v1(395,210)
GND: C1.2 C2.2 C3.2 C4.2 C5.2 C6.2 C7.2 C8.2 C9.2 C10.2 C11.2 C12.2 C13.2 C14.2 C15.1 C16.1 C17.2 C18.2 J1.1 J2.1 J3.1 J4.1 J5.1 J6.1 J7.1 J8.1 J9.1 J10.1 J11.1 J12.1 J13.1 J14.1 J15.3 J15.5 J15.9 J16.1 J17.1 J18.1 R3.2 R8.2 R11.2 R14.2 RS.1 RS.2 TP15.1 U1.3 U1.4 U2.1 U2.7 U3.1 U3.7 U4.1 U4.7 U5.2 U6.2 U7.2 U8.2 U9.4 U10.10 U10.17 U10.49 U10.57 U11.2 X1.2 YLED1.2 YLED2.2 YLED3.2 YLED4.2 YLED5.2 YLED6.2 | length 19807.4
  Top Layer w11: U10.17 1553.9,747.36 1607.64,747.36 v1(1608.82,746.18) ; U10.10 1750.75,826.09 1750.75,790.27 v1@1795.51,745.51 ; v1(1800.46,750.46) v1@1795.51,745.51 ; v1@1920.51,620.51 v1@1795.51,745.51 ; 1931.18,609.84 U10.57 2046.03,609.84 C14.2@2105,550.87 ; v1(1950,445) 1957.36,452.36 U10.49
  Top Layer w25: J16.1 350.5,190.5 350.5,596.39 ; J17.1 350.5,596.39 ; C12.2 v1(335,1235) ; C6.2 v1(335,1890) ; C4.2 v1(335,3015) ; C2.2 v1(335,4140) ; U4.1 U4.1@586.85,2515.19 ; U3.1 609.59,3640.19 ; U2.1 600.83,4765.19 ; v1(605,1505) 605,1311.58 604.21,1310.79 604.21,850.1 350.5,596.39 ; U11.2 812.99,607.99 v1(813.93,608.93) ; C18.2 817.56,689.43 865,641.98 v1(865,640) ; C13.2 v1(895,1215) ; 925,6550 935,6550 950,6535 1161.34,6535 YLED1.2 ; R14.2 1246.02,1856.02 1905.19,2515.19 U4.7 ; R8.2 1250.51,4115.51 1900.19,4765.19 U2.7 ; R11.2 1254.89,2756.87 1254.89,2994.89 1900.19,3640.19 U3.7 ; v1(1632.5,1332.5) 1635,1335 1876.34,1335 ; U1.4 1667.76,5227.77 1833.8,5227.77 R3.2 1841.2,5235.17 1854.45,5235.17 2151.71,5532.44 C11.2 ; YLED6.2 1876.34,1335 ; C15.1 v1(1975,250) ; C14.2@2105,550.87 C14.2 2110,543 v1(2110,595) ; YLED5.2@2160,1990 YLED5.2 v1(2225,1990) ; YLED4.2@2160,3135 YLED4.2 v1(2225,3135) ; YLED3.2@2160,4240 YLED3.2 v1(2220,4240) ; U7.2 v1(2275,4070) ; U5.2 v1(2280,1815) ; U6.2 v1(2280,2945) ; U8.2 v1(2280,5890) ; C10.2@2292.85,3775 C10.2 ; C7.2 C7.2@2303.38,2419.48 ; C8.2 1961.34,1420 1876.34,1335 ; C17.2 2675,460 ; J15.9 2549.05,800 2558.55,790.5 2561.77,790.5 2585.5,766.78 2585.5,733.22 2555.14,702.87 2547.87,702.87 J15.5 J15.3 2546.28,651.28 2678.72,651.28 C16.1 ; X1.2 2550,195.2 2675,320.2 2675,460 ; C16.1@2694.07,661.71 2694.07,666.63 2828.43,800.99 ; J12.1 2828.43,800.99 ; 2675,460 2828.43,613.43 2828.43,800.99
  Bottom Layer w11: v1(1608.82,746.18) 1610,745 1795,745 v1(1800.46,750.46) ; v1(1920,620) 1920,475 v1(1950,445)
  Bottom Layer w25: v1(335,1235) v1(605,1505) 775,1335 ; v1(335,1890) 335,2287.79 U4.1 ; v1(335,3015) 335,3412.79 U3.1 ; v1(335,4140) 335,4537.79 U2.1 ; v1(813.93,608.93) 833.93,608.93 v1(865,640) 895,670 v1(895,1215) 775,1335 ; v1(1632.5,1332.5) 1630,1335 775,1335 ; v1(1975,250) 1975,300 2110,435 v1(2110,595) 2203.33,595 2275.38,667.05 RS.2 RS.1 2416.34,922.95 J12.1 ; v1(2220,4240) 2275,4240 ; v1(2225,1990) 2280,1990 ; v1(2225,3135) 2280,3135 ; v1(2275,4070) 2275,4240 ; v1(2280,1815) 2280,1990 ; v1(2280,2945) 2280,3135 ; v1(2280,5890) 2688.39,5890 J2.1 ; C7.2 2298.9,2103.78 2280,2084.88 2280,1990 ; C5.2 2298.9,3238.78 2280,3219.88 2280,3135 ; C3.2 2298.9,4361.28 2275,4337.38 2275,4240
NetJ15_4: J15.4 TP10.1 U10.45 | length 819.6
  Top Layer w11: U10.45 1868.86,373.34 1868.86,337.52 1896.38,310 2051.99,310 2383.38,641.4 TP10.1@2383.38,650 ; TP10.1 J15.4
  Top Layer w25: TP10.1@2383.38,650 TP10.1
NetR1_1: R1.1 YLED1.1 | length 608
  Top Layer w25: R1.1@525.63,6480 v1(580.63,6480) ; v1(1080,6480) YLED1.1
  Bottom Layer w25: v1(580.63,6480) v1(1080,6480)
NetR2_1: R2.1 R3.1 | length 175
  Top Layer w25: R3.1 R2.1
NetR2_2: R2.2 U1.6 | length 168.5
  Top Layer w25: U1.6 1666.67,5525.9 1834.88,5525.9 R2.2
NetR4_2: R4.2 YLED2.1 | length 304.4
  Top Layer w25: YLED2.1 v1(1975,5500) ; v1(1975,5690) 1974.45,5690.55 R4.2 R4.2@1975,5750
  Bottom Layer w25: v1(1975,5500) v1(1975,5690)
NetR6_2: R6.2 YLED3.1 | length 72.1
  Top Layer w25: R6.2@2078.09,4168.52 2079.11,4169.55 2079.11,4239.55 YLED3.1
NetR8_1: R8.1 U2.4 | length 146
  Top Layer w25: U2.4 1188.54,4014.25 1188.54,3870.94 R8.1
NetR9_2: R9.2 YLED4.1 | length 82
  Top Layer w25: YLED4.1 2079.65,3134.02 2079.65,3059.02 2078.17,3057.54 R9.2
NetR11_1: R11.1 U3.4 | length 146.2
  Top Layer w25: U3.4 1188.8,2888.99 1188.8,2746.2 R11.1
NetR12_2: R12.2 YLED5.1 | length 77.4
  Top Layer w25: R12.2@2078.01,1913.52 R12.2 2079.08,1915.41 2079.08,1989.59 YLED5.1
NetR14_1: R14.1 U4.4 | length 146.3
  Top Layer w25: R14.1 1186.3,1621.3 1186.3,1763.89 U4.4
NetR15_2: R15.2 YLED6.1 | length 144.4
  Top Layer w25: YLED6.1 1744.61,1284.06 R15.2@1744.61,1140.94
NetR17_1: R17.1 RS.3 | length 82.7
  Top Layer w25: R17.1@2105,1000 2105,924.37 RS.3 RS.3@2110,926.54
Oscillator: U10.43 X1.3 | length 966.3
  Top Layer w11: U10.43 1829.21,206.65 1835.94,199.93 2284.46,199.93 2409.24,324.71 2529.91,324.71 2550,344.8 X1.3
Oscillator_OE/ST: U10.42 X1.1 | length 730.3
  Top Layer w11: U10.42 1809.53,186.44 1815.97,180 X1.1@2350,180
Power_In: C1.1 C2.1 C4.1 C6.1 C12.1 J1.2 J18.2 R1.2 TP1.1 U1.1 U2.2 U3.2 U4.2 U9.1
Reset: J15.10 RS.4 U10.47 | length 1052.8
  Top Layer w11: U10.47 1908.23,373.34 1908.23,337.52 1916.14,329.61 2044.72,329.61 2154.01,438.9 2154.01,460.73 ; RS.4@2106.42,657.85 2106.42,656.81 2154.01,609.22 2154.01,460.73 ; J15.10 2493.28,800 2291,597.72 2291,594.23 2157.5,460.73 2154.01,460.73
pads on no net: J1. J2.9 J3.9 J4.9 J5.9 J6.9 J7.9 J8.9 J9.9 J10.9 J11.9 J12.9 J13.9 J14.9 J15.6 J15.7 J15.8 J16. J16.2 J16.7 J17. J17.2 J17.7 J18. R16.2 U10.1 U10.12 U10.13 U10.14 U10.15 U10.16 U10.18 U10.19 U10.20 U10.21 U10.22 U10.23 U10.24 U10.25 U10.27 U10.28 U10.29 U10.30 U10.31 U10.32 U10.33 U10.34 U10.35 U10.36 U10.37 U10.38 U10.46 U10.48 U10.51 U10.52 U10.53 U10.54 U10.55 U10.58 U10.59 U10.60 U10.61 U10.62 U10.63 U10.64 U11.5
copper on no net: | length 4.9
  Top Layer w25: 300,765 303.49,761.51

## Polygon pours and split planes (outlines as drawn)
3V3_Out on Top Layer "3V3_OUT_L01_P036" (solid, pour order 36): 2375,2325 2380,2330 2380,2500 2675,2500 2675,1250 2475,1250 2475,1530 2110,1530 2110,1700 2225,1700 2225,2325
5V_Out on Top Layer "5V_OUT_L01_P030" (solid, pour order 30): 2475,3850 2375,3850 2375,3475 2225,3475 2225,2820 2105,2820 2105,2715 2375,2715 2375,2525 2675,2525 2675,4025 2475,4025
12V_Out on Top Layer "12V_OUT_L01_P026" (solid, pour order 26): 2105,3945 2105,3870 2440,3870 2440,4050 2675,4050 2675,5600 2375,5600 2375,4600 2200,4600 2200,3945
GND on Top Layer "GND_L01_P016" (solid, pour order 16): 1860,2455 1255,1850 1005,1850 1005,1170 480,1170 480,1660 660,1660 660,1845 480,1845 480,2805 660,2805 660,2975 480,2975 480,3935 660,3935 660,4095 480,4095 480,5300 650,5300 650,7525 1005,7525 3050,7525 3050,1250 2725,1250 2725,7020 1575,7020 1575,5350 1765,5350 1765,5125 2350,5125 2350,4625 2250,4625 2250,4710 2250,4750 2085,4750 2085,4710 1860,4710 1260,4110 1005,4110 1005,3800 2250,3800 2350,3800 2350,3700 2350,3500 2250,3500 2250,3590 2250,3635 2070,3635 2070,3590 1865,3590 1265,2990 1005,2990 1005,2630 2250,2630 2255,2635 2350,2635 2350,2575 2350,2350 2250,2350 2250,2495 2070,2495 2070,2455
Power_In on Top Layer "POWER_IN_L01_P006" (solid, pour order 6): 635,4070 455,4070 455,5745 625,5745 625,7530 25,7530 25,1025 555,1025 555,1125 455,1125 455,1705 635,1705 635,1820 455,1820 455,2830 635,2830 635,2950 455,2950 455,3960 635,3960
3V3_Converter_Out on Top Layer "3V3_CONVERTER_OUT_L01_P034" (solid, pour order 34): 1870,2430 1290,1850 1290,1705 2200,1705 2200,2350 2225,2350 2225,2430 2225,2470 2095,2470 2095,2430
5V_Converter_Out on Top Layer "5V_CONVERTER_OUT_L01_P028" (solid, pour order 28): 1875,3565 1290,2980 1290,2830 2200,2830 2200,3500 2225,3500 2225,3570 2225,3610 2095,3610 2095,3565
12V_Converter_Out on Top Layer "12V_CONVERTER_OUT_L01_P022" (solid, pour order 22): 1870,4685 1285,4100 1285,3960 2175,3960 2175,4625 2225,4625 2225,4690 2225,4725 2110,4725 2110,4685
24V_Converter_Out on Top Layer "24V_CONVERTER_OUT_L01_P010" (solid, pour order 10): 1600,6995 2170,6995 2170,5790 2045,5790 2045,5625 1600,5625
24V_Out on Top Layer "24V_OUT_L01_P014" (solid, pour order 14): 2180,5900 2180,5780 2055,5780 2055,5625 2675,5625 2675,6995 2180,6995
no net on Top Layer "Top Layer-No Net" (solid, pour order 4): 50,7050
no net on Top Layer "Top Layer-No Net 1" (solid, pour order 0): 100,7100
Power_In on Bottom Layer "POWER_IN_L02_P037" (solid, pour order 37): 25,7530 625,7530 625,5745 455,5745 455,4070 635,4070 635,3960 455,3960 455,2950 635,2950 635,2830 455,2830 455,1820 635,1820 635,1705 455,1705 455,1125 555,1125 555,1025 25,1025
GND on Bottom Layer "GND_L02_P020" (solid, remove dead copper, pour order 20): 650,5473.47 864.31,5259.16 864.31,1800.35 860.87,1796.92 889.48,1768.31 889.48,3869.58 1005,3985.1 1005,4110 1260,4110 1860,4710 2085,4710 2085,4750 2250,4750 2250,4625 2350,4625 2350,5125 1765,5125 2725,5125 2725,1250 3050,1250 3050,7525 1035,7525 1040,7530 650,7530

## Other copper
Top Layer:
  pour cut-out: 645,1685

## Silkscreen, mask and mechanical layers (free items; w line width, h text height)
Top Overlay:
  drawing of 120 lines, arcs and shapes, not listed
  text "Robert Warren" at 1110,7430 h60
  text "Chassis Power / Distribution" at 1105,7190 h60
  text "Revision 1" at 1130,7085 h60
  text "CAN" at 250,885 h60
  text "CAN" at 250,380 h60
Mechanical 1:
  the board outline again, w10

## Text inside footprints (layer, text, board x,y; h text height)
U10: Top Overlay "16" at 1620,870 h19.68; Top Overlay "17" at 1485,740 h19.68; Top Overlay "32" at 1485,440 h19.68; Top Overlay "33" at 1620,310 h19.68; Top Overlay "48" at 1920,310 h19.68; Top Overlay "49" at 1995,415 h19.68; Top Overlay "64" at 2000,765 h19.68